# Altium PCB RemoteQuarium_pcb_design.PcbDoc
Units mm, origin at the board's own origin, x right, y up, seen from the top; angles counter-clockwise.
Board outline 63.5 x 89.41 mm, 2 copper layers (F.Cu, B.Cu); 22 components, 37 nets, 118 pads, 0 vias.
Unrouted connection lines stored in the file: 5.
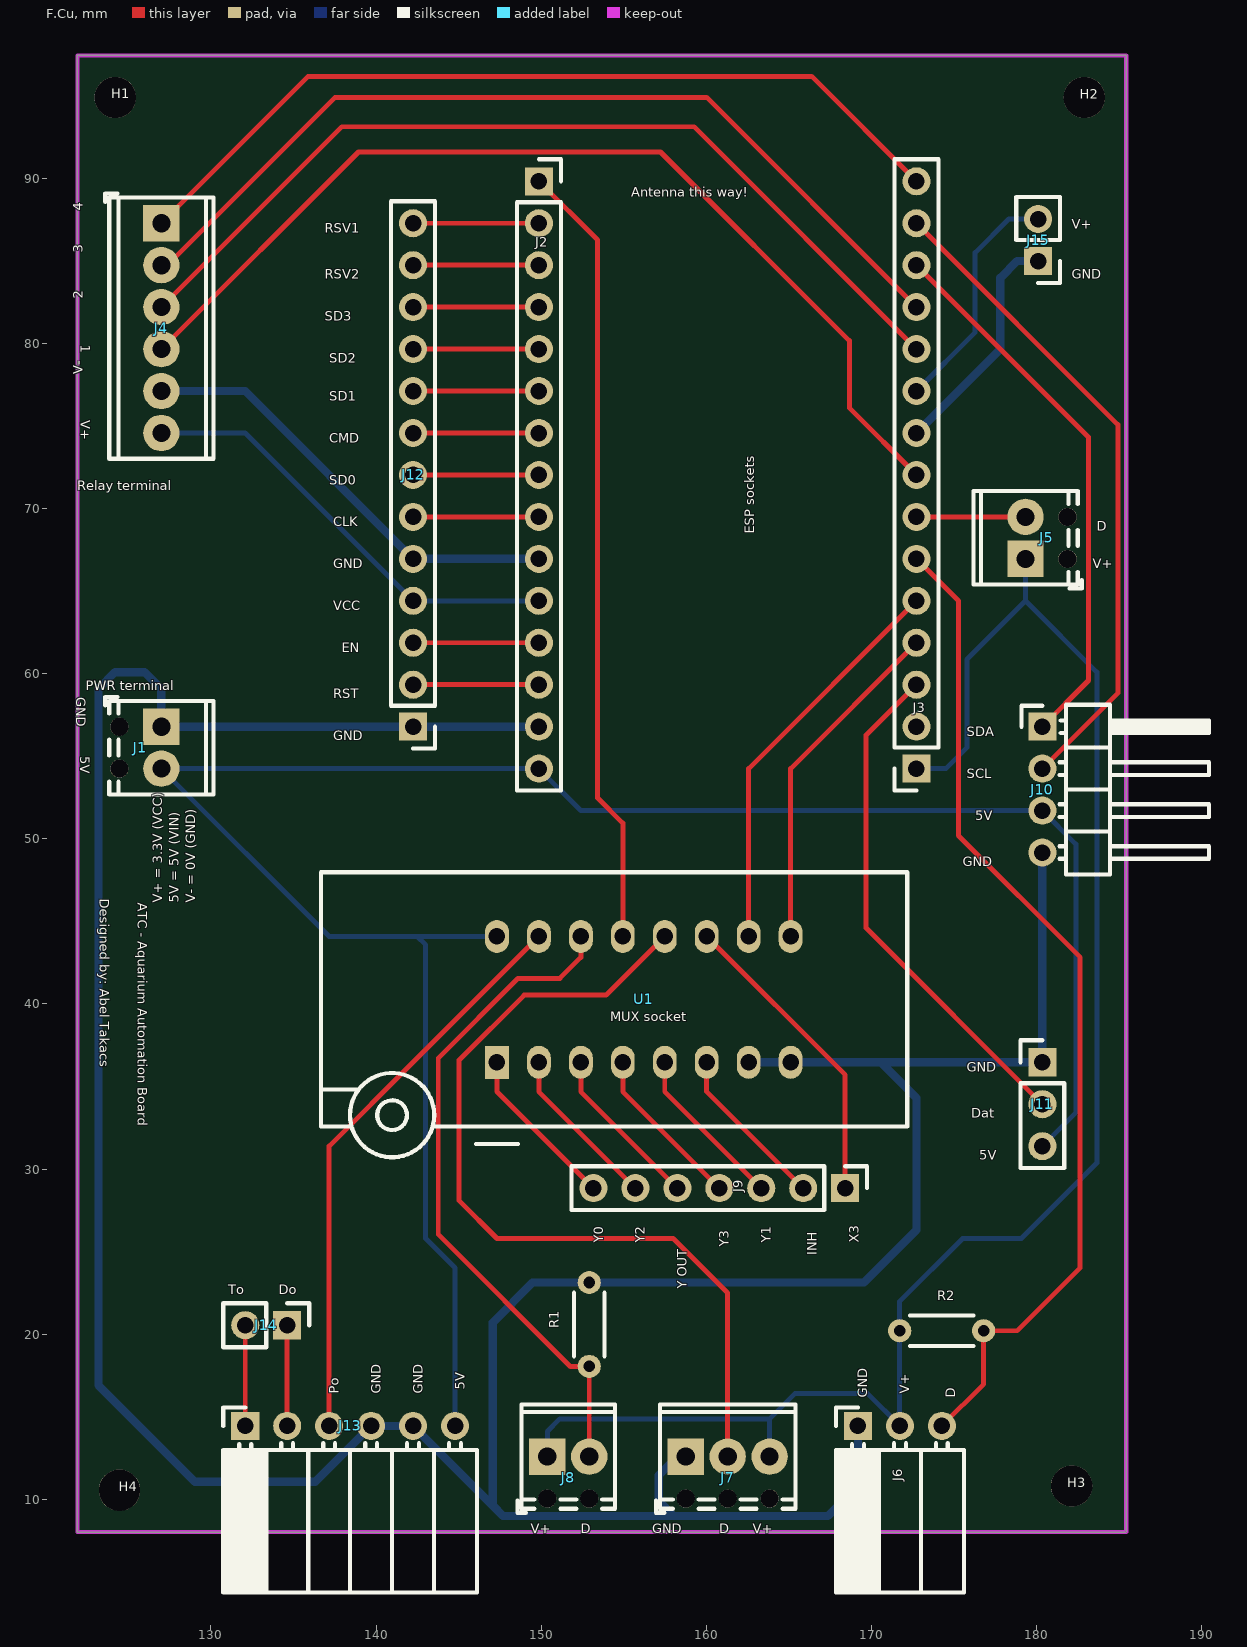
[diagram p0: F.Cu view]
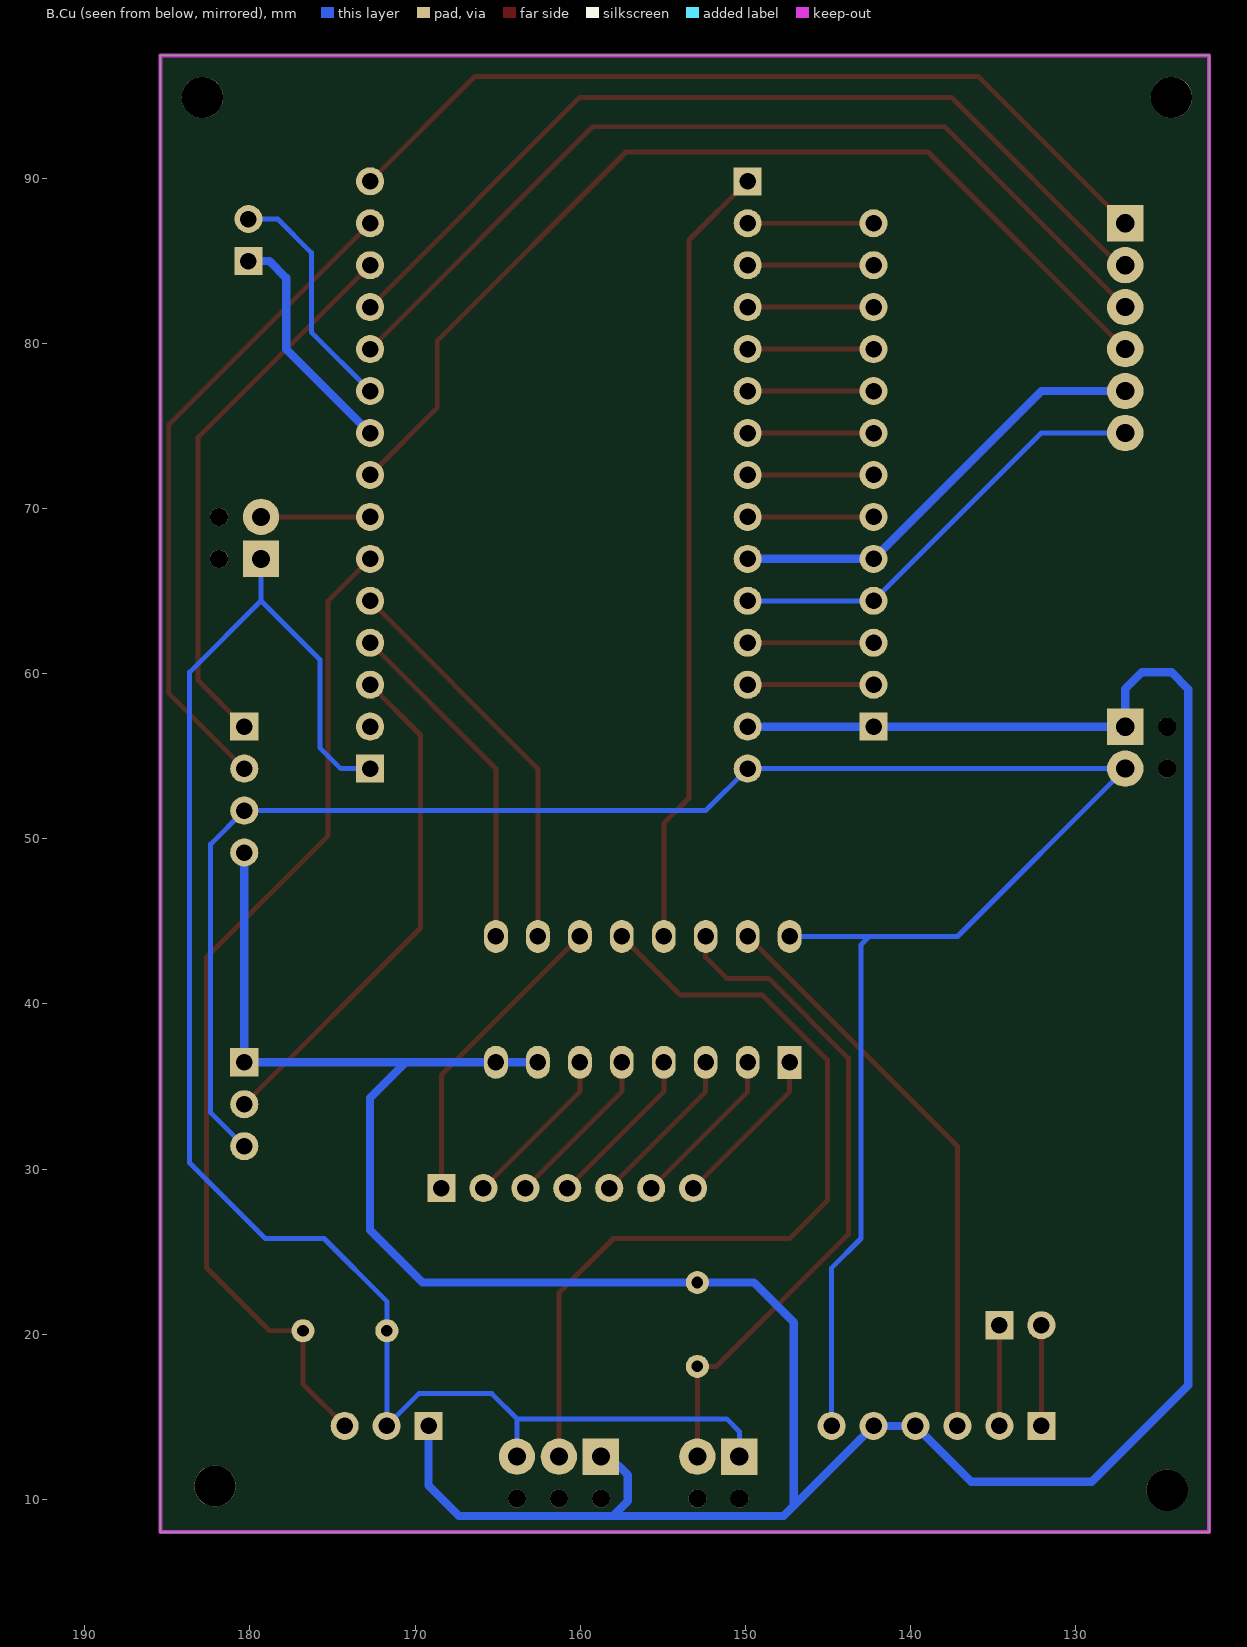
[diagram p1: B.Cu view, seen from below]

## Layer stack, top to bottom
F.Mask: solder mask 0.0102, Solder Resist, Dk 3.5
F.Cu: signal copper 0.0356
Dielectric 1: dielectric 0.32, FR-4, Dk 4.8
B.Cu: signal copper 0.0356
B.Mask: solder mask 0.0102, Solder Resist, Dk 3.5

## Board outline
185.42,8.018 185.42,97.426 121.92,97.426 121.92,8.018 185.42,8.018

## Design rules (kind name [scope] priority, off if disabled: settings)
Clearance [All] p1: gap=0.254 ignorepadtopadclearanceinfootprint=FALSE except(0: Arc-Hole Track-Hole SMDPad-Hole THPad-Hole Via-Hole Fill-Hole Poly-Hole Region-Hole Text-Hole)
MinimumSolderMaskSliver [All] p1: minsoldermaskwidth=0
PolygonConnect [All] p1: connectstyle=Direct reliefconductorwidth=0.254 reliefentries=4 polygonreliefangle="90 Angle" airgapwidth=0.254
RoutingVias [All] p1: holewidth=0.711 width=1.27 viastyle="Through Hole" minholewidth=0.711 minwidth=1.27 maxholewidth=0.711 maxwidth=1.27
SilkToSilkClearance [All] p1: silktosilkclearance=0
SilkToSolderMaskClearance [IsPad] p1: minsilkscreentomaskgap=0 clearancetoexposedcopper=TRUE
SolderMaskExpansion [All] p1: expansion=0.102 istentingtop=FALSE
Width [All] p1: maxlimit=10 minlimit=0.254 preferedwidth=0.254 minimp=50.000000 maximp=50.000000 favimp=50.000000
27 further rules are at their usual default settings.

## Components (designator, comment, footprint, x,y, rotation, side; value= is the part's Value field where it differs from the comment)
H1 "MountingHole" MountingHole_2.5mm 124.206,94.886 r0 top
H2 "MountingHole" MountingHole_2.5mm 182.88,94.886 r0 top
H3 "MountingHole" MountingHole_2.5mm 182.118,10.812 r0 top
H4 "MountingHole" MountingHole_2.5mm 124.46,10.558 r0 top
J1 "Power_terminal" TerminalBlock_Phoenix_MPT-0,5-2-2.54_1x02_P2.54mm_Horizontal 127,56.786 r270 top
J2 "ESP left side sockets" PinSocket_1x15_P2.54mm_Vertical 149.86,89.806 r0 top
J3 "ESP right side sockets" PinSocket_1x15_P2.54mm_Vertical 172.72,54.246 r180 top
J4 "Relay_terminal" TerminalBlock_Phoenix_MPT-0,5-6-2.54_1x06_P2.54mm_Horizontal 127,87.266 r270 top
J5 "Calibration_btn" TerminalBlock_Phoenix_MPT-0,5-2-2.54_1x02_P2.54mm_Horizontal 179.324,66.946 r90 top
J6 "Temp_sensor_socket" PinSocket_1x03_P2.54mm_Horizontal 169.179,14.45 r90 top
J7 "Water_sensor_terminal" TerminalBlock_Phoenix_MPT-0,5-3-2.54_1x03_P2.54mm_Horizontal 158.75,12.59 r0 top
J8 "Light_sensor_terminal" TerminalBlock_Phoenix_MPT-0,5-2-2.54_1x02_P2.54mm_Horizontal 150.368,12.59 r0 top
J9 "MUX_pins" PinHeader_1x07_P2.54mm_Vertical 168.402,28.846 r270 top
J10 "LCD_pins" PinHeader_1x04_P2.54mm_Horizontal 180.34,56.786 r0 top
J11 "Feeder_servo_pins" PinHeader_1x03_P2.54mm_Vertical 180.34,36.466 r0 top
J12 "ESP_pins" PinHeader_1x13_P2.54mm_Vertical 142.24,56.786 r180 top
J13 "PH_sensor_sockets" PinSocket_1x06_P2.54mm_Horizontal 132.08,14.45 r90 top
J14 "Ph_sesnor-pins" PinHeader_1x02_P2.54mm_Vertical 134.62,20.546 r270 top
J15 "Vcc-GND" PinHeader_1x02_P2.54mm_Vertical 180.086,84.98 r180 top
R1 "10000" R_Axial_DIN0204_L3.6mm_D1.6mm_P5.08mm_Horizontal 152.908,18.051 r90 top
R2 "4700R" R_Axial_DIN0204_L3.6mm_D1.6mm_P5.08mm_Horizontal 171.704,20.21 r0 top
U1 "CD4052BE" DIP_Socket-16_W4.3_W5.08_W7.62_W10.16_W10.9_3M_216-3340-00-0602J 147.32,36.466 r90 top

## Footprints (in the part's own frame and the unit in brackets; to place one, negate y for a bottom-side part, rotate by r counter-clockwise, add the part's x,y. Pads: shape width x height; smd on the part's side, far side on the other; paste and mask are expansions set on the pad)
DIP_Socket-16_W4.3_W5.08_W7.62_W10.16_W10.9_3M_216-3340-00-0602J [mm]
  rect 2x1.44 hole 1 paste-2 mask+0: 1(0,0)
  rrect100% 2x1.44 hole 1 paste-2 mask+0: 2(0,-2.54) 3(0,-5.08) 4(0,-7.62) 5(0,-10.16) 6(0,-12.7) 7(0,-15.24) 8(0,-17.78) 9(7.62,-17.78) 10(7.62,-15.24) 11(7.62,-12.7) 12(7.62,-10.16) 13(7.62,-7.62) 14(7.62,-5.08) 15(7.62,-2.54) 16(7.62,0)
  silkscreen extent -5.75,-24.84 11.51,10.66
MountingHole_2.5mm [mm]
  round 2.5 hole 2.5 paste-2.5 mask+0: Un1(0,0)
PinHeader_1x02_P2.54mm_Vertical [mm]
  rect 1.7x1.7 hole 1 paste-1.7 mask+0: 1(0,0)
  rrect100% 1.7x1.7 hole 1 paste-1.7 mask+0: 2(0,-2.54)
  silkscreen extent -1.33,-3.87 1.33,1.33
PinHeader_1x03_P2.54mm_Vertical [mm]
  rect 1.7x1.7 hole 1 paste-1.7 mask+0: 1(0,0)
  rrect100% 1.7x1.7 hole 1 paste-1.7 mask+0: 2(0,-2.54) 3(0,-5.08)
  silkscreen extent -1.33,-6.41 1.33,1.33
PinHeader_1x04_P2.54mm_Horizontal [mm]
  rect 1.7x1.7 hole 1 paste-1.7 mask+0: 1(0,0)
  rrect100% 1.7x1.7 hole 1 paste-1.7 mask+0: 2(0,-2.54) 3(0,-5.08) 4(0,-7.62)
  silkscreen extent -1.27,-8.95 10.1,1.33
PinHeader_1x07_P2.54mm_Vertical [mm]
  rect 1.7x1.7 hole 1 paste-1.7 mask+0: 1(0,0)
  rrect100% 1.7x1.7 hole 1 paste-1.7 mask+0: 2(0,-2.54) 3(0,-5.08) 4(0,-7.62) 5(0,-10.16) 6(0,-12.7) 7(0,-15.24)
  silkscreen extent -1.33,-16.57 1.33,1.33
PinHeader_1x13_P2.54mm_Vertical [mm]
  rect 1.7x1.7 hole 1 paste-1.7 mask+0: 1(0,0)
  rrect100% 1.7x1.7 hole 1 paste-1.7 mask+0: 2(0,-2.54) 3(0,-5.08) 4(0,-7.62) 5(0,-10.16) 6(0,-12.7) 7(0,-15.24) 8(0,-17.78) 9(0,-20.32) 10(0,-22.86) 11(0,-25.4) 12(0,-27.94) 13(0,-30.48)
  silkscreen extent -1.33,-31.81 1.33,1.33
PinSocket_1x03_P2.54mm_Horizontal [mm]
  rect 1.7x1.7 hole 1 paste-1.7 mask+0: 1(0,0)
  rrect100% 1.7x1.7 hole 1 paste-1.7 mask+0: 2(0,-2.54) 3(0,-5.08)
  silkscreen extent -10.09,-6.41 1.11,1.33
PinSocket_1x06_P2.54mm_Horizontal [mm]
  rect 1.7x1.7 hole 1 paste-1.7 mask+0: 1(0,0)
  rrect100% 1.7x1.7 hole 1 paste-1.7 mask+0: 2(0,-2.54) 3(0,-5.08) 4(0,-7.62) 5(0,-10.16) 6(0,-12.7)
  silkscreen extent -10.09,-14.03 1.11,1.33
PinSocket_1x15_P2.54mm_Vertical [mm]
  rect 1.7x1.7 hole 1 paste-1.7 mask+0: 1(0,0)
  rrect100% 1.7x1.7 hole 1 paste-1.7 mask+0: 2(0,-2.54) 3(0,-5.08) 4(0,-7.62) 5(0,-10.16) 6(0,-12.7) 7(0,-15.24) 8(0,-17.78) 9(0,-20.32) 10(0,-22.86) 11(0,-25.4) 12(0,-27.94) 13(0,-30.48) 14(0,-33.02) 15(0,-35.56)
  silkscreen extent -1.33,-36.89 1.33,1.33
R_Axial_DIN0204_L3.6mm_D1.6mm_P5.08mm_Horizontal [mm]
  round 1.4 hole 0.7 paste-1.4 mask+0: 1(0,0)
  rrect100% 1.4x1.4 hole 0.7 paste-1.4 mask+0: 2(5.08,0)
  silkscreen extent 0.62,-0.92 4.46,0.92
TerminalBlock_Phoenix_MPT-0,5-2-2.54_1x02_P2.54mm_Horizontal [mm]
  rect 2.2x2.2 hole 1.1 paste-2.2 mask+0: 1(0,0)
  round 2.2 hole 1.1 paste-2.2 mask+0: 2(2.54,0)
  round 1.1 hole 1.1 paste-1.1 mask+0: Un1(0,-2.54) Un2(2.54,-2.54)
  silkscreen extent -1.8,-3.4 4.1,3.16
TerminalBlock_Phoenix_MPT-0,5-3-2.54_1x03_P2.54mm_Horizontal [mm]
  rect 2.2x2.2 hole 1.1 paste-2.2 mask+0: 1(0,0)
  round 2.2 hole 1.1 paste-2.2 mask+0: 2(2.54,0) 3(5.08,0)
  round 1.1 hole 1.1 paste-1.1 mask+0: Un1(0,-2.54) Un2(2.54,-2.54) Un3(5.08,-2.54)
  silkscreen extent -1.8,-3.4 6.64,3.16
TerminalBlock_Phoenix_MPT-0,5-6-2.54_1x06_P2.54mm_Horizontal [mm]
  rect 2.2x2.2 hole 1.1 paste-2.2 mask+0: 1(0,0)
  round 2.2 hole 1.1 paste-2.2 mask+0: 2(2.54,0) 3(5.08,0) 4(7.62,0) 5(10.16,0) 6(12.7,0)
  silkscreen extent -1.8,-3.4 14.26,3.16

## Part data
H1 H2 H3 H4: library part MountingHole_2.5mm, "Mounting Hole 2.5mm, no annular", Sheetfile=RemoteQuarium_pcb_design.kicad_sch, ki_description="Mounting Hole without connection", ki_keywords="mounting hole"
J1 J5 J8: library part TerminalBlock_Phoenix_MPT-0,5-2-2.54_1x02_P2.54mm_Horizontal, "Terminal Block Phoenix MPT-0,5-2-2.54, 2 pins, pitch 2.54mm, size 5.54x6.2mm^2, drill diamater 1.1mm, pad diameter 2.2mm, see http://www.mouser.com/ds/2/324/ItemDetail_1725656-920552.pdf, script-generated using https://github.com/pointhi/kicad-footprint-generator/scripts/TerminalBlock_Phoenix", Sheetfile=RemoteQuarium_pcb_design.kicad_sch, ki_description="Generic screw terminal, single row, 01x02, script generated (kicad-library-utils/schlib/autogen/connector/)", ki_keywords="screw terminal"
J2 J3: library part PinSocket_1x15_P2.54mm_Vertical, "Through hole straight socket strip, 1x15, 2.54mm pitch, single row (from Kicad 4.0.7), script generated", Sheetfile=RemoteQuarium_pcb_design.kicad_sch, ki_description="Generic connector, single row, 01x15, script generated", ki_keywords=connector
J4: library part TerminalBlock_Phoenix_MPT-0,5-6-2.54_1x06_P2.54mm_Horizontal, "Terminal Block Phoenix MPT-0,5-6-2.54, 6 pins, pitch 2.54mm, size 15.7x6.2mm^2, drill diamater 1.1mm, pad diameter 2.2mm, see http://www.mouser.com/ds/2/324/ItemDetail_1725672-916605.pdf, script-generated using https://github.com/pointhi/kicad-footprint-generator/scripts/TerminalBlock_Phoenix", Sheetfile=RemoteQuarium_pcb_design.kicad_sch, ki_description="Generic screw terminal, single row, 01x06, script generated (kicad-library-utils/schlib/autogen/connector/)", ki_keywords="screw terminal"
J6: library part PinSocket_1x03_P2.54mm_Horizontal, "Through hole angled socket strip, 1x03, 2.54mm pitch, 8.51mm socket length, single row (from Kicad 4.0.7), script generated", Sheetfile=RemoteQuarium_pcb_design.kicad_sch, ki_description="Generic connector, single row, 01x03, script generated", ki_keywords=connector
J7: library part TerminalBlock_Phoenix_MPT-0,5-3-2.54_1x03_P2.54mm_Horizontal, "Terminal Block Phoenix MPT-0,5-3-2.54, 3 pins, pitch 2.54mm, size 8.08x6.2mm^2, drill diamater 1.1mm, pad diameter 2.2mm, see http://www.mouser.com/ds/2/324/ItemDetail_1725656-920552.pdf, script-generated using https://github.com/pointhi/kicad-footprint-generator/scripts/TerminalBlock_Phoenix", Sheetfile=RemoteQuarium_pcb_design.kicad_sch, ki_description="Generic screw terminal, single row, 01x03, script generated (kicad-library-utils/schlib/autogen/connector/)", ki_keywords="screw terminal"
J9: library part PinHeader_1x07_P2.54mm_Vertical, "Through hole straight pin header, 1x07, 2.54mm pitch, single row", Sheetfile=RemoteQuarium_pcb_design.kicad_sch, ki_description="Generic connector, single row, 01x07, script generated (kicad-library-utils/schlib/autogen/connector/)", ki_keywords=connector
J10: library part PinHeader_1x04_P2.54mm_Horizontal, "Through hole angled pin header, 1x04, 2.54mm pitch, 6mm pin length, single row", Sheetfile=RemoteQuarium_pcb_design.kicad_sch, ki_description="Generic connector, single row, 01x04, script generated (kicad-library-utils/schlib/autogen/connector/)", ki_keywords=connector
J11: library part PinHeader_1x03_P2.54mm_Vertical, "Through hole straight pin header, 1x03, 2.54mm pitch, single row", Sheetfile=RemoteQuarium_pcb_design.kicad_sch, ki_description="Generic connector, single row, 01x03, script generated (kicad-library-utils/schlib/autogen/connector/)", ki_keywords=connector
J12: library part PinHeader_1x13_P2.54mm_Vertical, "Through hole straight pin header, 1x13, 2.54mm pitch, single row", Sheetfile=RemoteQuarium_pcb_design.kicad_sch, ki_description="Generic connector, single row, 01x13, script generated (kicad-library-utils/schlib/autogen/connector/)", ki_keywords=connector
J13: library part PinSocket_1x06_P2.54mm_Horizontal, "Through hole angled socket strip, 1x06, 2.54mm pitch, 8.51mm socket length, single row (from Kicad 4.0.7), script generated", Sheetfile=RemoteQuarium_pcb_design.kicad_sch, ki_description="Generic connector, single row, 01x06, script generated", ki_keywords=connector
J14 J15: library part PinHeader_1x02_P2.54mm_Vertical, "Through hole straight pin header, 1x02, 2.54mm pitch, single row", Sheetfile=RemoteQuarium_pcb_design.kicad_sch, ki_description="Generic connector, single row, 01x02, script generated (kicad-library-utils/schlib/autogen/connector/)", ki_keywords=connector
R1 R2: library part R_Axial_DIN0204_L3.6mm_D1.6mm_P5.08mm_Horizontal, "Resistor, Axial_DIN0204 series, Axial, Horizontal, pin pitch=5.08mm, 0.167W, length*diameter=3.6*1.6mm^2, http://cdn-reichelt.de/documents/datenblatt/B400/1_4W%23YAG.pdf", Sheetfile=RemoteQuarium_pcb_design.kicad_sch, ki_description=Resistor, ki_keywords="R res resistor"
U1: library part DIP_Socket-16_W4.3_W5.08_W7.62_W10.16_W10.9_3M_216-3340-00-0602J, "3M 16-pin zero insertion force socket, through-hole, row spacing 7.62 mm (300 mils), http://multimedia.3m.com/mws/media/494546O/3mtm-dip-sockets-100-2-54-mm-ts0365.pdf", Package="PDIP-16 Texas Instruments", Availability="In Stock", Check_prices=https://www.snapeda.com/parts/CD4052BE/Texas+Instruments/view-part/?ref=eda, Description="\n20-V, 4:1, 2-channel general-purpose multiplexer\n", MF="Texas Instruments", MP=CD4052BE, Price=None, Purchase-URL="https://www.snapeda.com/api/url_track_click_mouser/?unipart_id=229377&manufacturer=Texas Instruments&part_name=CD4052BE&search_term=None", Sheetfile=RemoteQuarium_pcb_design.kicad_sch, SnapEDA_Link=https://www.snapeda.com/parts/CD4052BE/Texas+Instruments/view-part/?ref=snap

## Nets (pads, with @x,y where several pads share a name; then routed paths per layer and width w, separated by ;. In a path a pad name is that pad's centre, name@x,y a point inside that pad or via, vN(x,y) a via of type N, cw(c..) or ccw(c..) an arc to the next point about the centre after c; other vN are vias at no path point)
A0: J2.1 U1.13 | length 47.8
  F.Cu w0.3: J2.1 153.416,86.25 153.416,52.468 154.94,50.944 154.94,48.912 U1.13
CLK: J2.9 J12.6 | length 7.6
  F.Cu w0.3: J12.6 J2.9
CMD: J2.7 J12.8 | length 7.6
  F.Cu w0.3: J12.8 J2.7
D0: J3.15 J4.1 | length 52
  F.Cu w0.3: J4.1 135.89,96.156 166.37,96.156 J3.15
D3: J3.12 J4.2 | length 55.2
  F.Cu w0.3: J4.2 127.36,84.726 137.52,94.886 160.02,94.886 J3.12
D4: J3.11 J4.3 | length 55.8
  F.Cu w0.3: J4.3 137.922,93.108 159.258,93.108 J3.11
D5: J3.8 J4.4 | length 61.1
  F.Cu w0.3: J4.4 138.938,91.584 157.226,91.584 168.656,80.154 168.656,76.09 J3.8
D6: J3.7 J5.2 | length 6.6
  F.Cu w0.3: J3.7 J5.2
D7: J3.6 J6.3 R2.2 | length 61.3
  F.Cu w0.3: J3.6 175.26,64.406 175.26,50.182 182.626,42.816 182.626,24.02 178.816,20.21 R2.2 176.784,16.975 J6.3
D8: J3.5 U1.10 | length 24.5
  F.Cu w0.3: U1.10 162.56,49.166 162.56,54.246 J3.5
Do: J13.2 J14.1 | length 6.1
  F.Cu w0.3: J13.2 J14.1
EN: J2.12 J12.3 | length 7.6
  F.Cu w0.3: J12.3 J2.12
GND: J1.1 J2.10 J2.14 J3.2 J3.9 J4.5 J6.1 J7.1 J10.4 J11.1 J12.1 J12.5 J13.4 J13.5 J15.1 R1.2 U1.7 U1.8 | length 256.1
  B.Cu w0.5: J4.5 132.08,77.106 J12.5 J2.10 ; J2.14 J12.1 J1.1 127,59.072 125.984,60.088 124.206,60.088 123.19,59.072 123.19,16.908 129.032,11.066 136.316,11.066 J13.4 J13.5 147.69,9 ; J7.1 158.242,12.59 157.119,11.467 157.119,9.903 158.022,9 ; U1.7 U1.8 170.561,36.466 170.624,36.403 ; J6.1 169.179,10.827 167.352,9 158.022,9 ; J3.9 177.8,79.646 177.8,83.964 178.816,84.98 J15.1 ; J10.4 J11.1 170.688,36.466 170.624,36.403 ; 147.69,9 158.022,9 ; 147.69,9 147.066,9.624 147.066,20.718 149.479,23.131 R1.2 169.545,23.131 172.72,26.306 172.72,34.307 170.624,36.403
INH: J9.2 U1.6 | length 10
  F.Cu w0.3: U1.6 160.02,34.688 J9.2
LIGHT_DAT: J8.2 R1.1 U1.14 | length 40.9
  F.Cu w0.3: U1.14 152.4,42.816 151.13,41.546 148.59,41.546 143.764,36.72 143.764,26.052 151.765,18.051 R1.1 J8.2@152.908,12.717
P0: J13.3 U1.15 | length 34.9
  F.Cu w0.3: J13.3 137.16,31.386 142.24,36.466 U1.15
RST: J2.13 J12.2 | length 7.6
  F.Cu w0.3: J12.2 J2.13
RSV1: J2.2 J12.13 | length 7.6
  F.Cu w0.3: J12.13 J2.2
RSV2: J2.3 J12.12 | length 7.6
  F.Cu w0.3: J12.12 J2.3
RX: J3.4 U1.9 | length 20.9
  F.Cu w0.3: U1.9 165.1,49.166 165.1,54.246 J3.4
SCL: J3.14 J10.2 | length 40
  F.Cu w0.3: J3.14 184.912,75.074 184.912,58.818 J10.2
SD0: J2.8 J12.7 | length 7.6
  F.Cu w0.3: J12.7 J2.8
SD1: J2.6 J12.9 | length 7.6
  F.Cu w0.3: J12.9 J2.6
SD2: J2.5 J12.10 | length 7.6
  F.Cu w0.3: J12.10 J2.5
SD3: J2.4 J12.11 | length 7.6
  F.Cu w0.3: J12.11 J2.4
SDA: J3.13 J10.1 | length 33.4
  F.Cu w0.3: J3.13 183.134,74.312 183.134,59.58 J10.1
T0: J13.1 J14.2 | length 6.1
  F.Cu w0.3: J13.1 J14.2
TX: J3.3 J11.2 | length 31.1
  F.Cu w0.3: J3.3 169.672,56.278 169.672,44.594 J11.2
VCC: J2.11 J3.1 J3.10 J4.6 J5.1 J6.2 J7.3 J8.1 J12.4 J15.2 R2.1 | length 144.3
  F.Cu w0.3: R2.1 R2.1@171.719,20.195
  B.Cu w0.3: J4.6 132.08,74.566 J12.4 J2.11 ; J8.1 150.368,14.114 151.13,14.876 163.83,14.876 ; J7.3 163.83,14.876 ; J6.2@171.719,13.875 J6.2 ; J3.1 174.498,54.246 175.768,55.516 175.768,60.85 179.324,64.406 ; J3.10 176.276,80.662 176.276,85.488 178.308,87.52 J15.2 ; J5.1 179.324,64.406 ; 163.83,14.876 165.354,16.4 169.769,16.4 J6.2 ; J6.2 171.704,14.465 R2.1 171.704,21.988 175.514,25.798 179.07,25.798 183.642,30.37 183.642,60.088 179.324,64.406
VIN: J1.2 J2.15 J10.3 J11.3 J13.6 U1.16 | length 132
  B.Cu w0.3: J13.6 144.78,24.02 143.002,25.798 143.002,43.578 142.494,44.086 142.24,44.086 ; U1.16 142.24,44.086 ; 160.02,51.706 160.274,51.706 ; J11.3 182.372,33.418 182.372,49.674 J10.3 160.274,51.706 ; 142.24,44.086 137.16,44.086 J1.2 J2.15 152.4,51.706 160.274,51.706
WATER_DAT: J7.2 U1.12 | length 52.5
  F.Cu w0.3: U1.12 153.924,40.53 148.964,40.53 145.034,36.6 145.034,28.084 147.32,25.798 157.988,25.798 161.29,22.496 J7.2
X3: J9.1 U1.11 | length 18.7
  F.Cu w0.3: U1.11 168.402,35.704 J9.1
Y: J9.5 U1.3 | length 10
  F.Cu w0.3: U1.3 152.4,34.688 J9.5
Y0: J9.7 U1.1 | length 10
  F.Cu w0.3: U1.1 147.32,34.688 J9.7
Y1: J9.3 U1.5 | length 10
  F.Cu w0.3: U1.5 157.48,34.688 J9.3
Y2: J9.6 U1.2 | length 10.3
  F.Cu w0.3: U1.2 149.86,34.688 J9.6 J9.6@155.956,28.846
Y3: J9.4 U1.4 | length 10
  F.Cu w0.3: U1.4 154.94,34.688 J9.4
pads on no net: H1.Un1 H2.Un1 H3.Un1 H4.Un1 J1.Un1 J1.Un2 J5.Un1 J5.Un2 J7.Un1 J7.Un2 J7.Un3 J8.Un1 J8.Un2

## Keep-outs
Edge.Cuts:
  lines w0: 121.92,8.018 185.42,8.018 185.42,97.426 121.92,97.426 121.92,8.018
  lines w0.254: 121.92,8.018 185.42,8.018 185.42,97.426 121.92,97.426 121.92,8.018

## Silkscreen, mask and mechanical layers (free items; w line width, h text height)
F.SilkS:
  text "Antenna this way!" at 155.448,88.662 h1
  text "4" at 122.454,88.028 h1 r90
  text "V+" at 182.118,86.731 h1
  text "RSV1" at 136.906,86.474 h1
  text "3" at 122.459,85.488 h1 r90
  text "RSV2" at 136.906,83.68 h1
  text "GND" at 182.118,83.68 h1
  text "2" at 122.454,82.694 h1 r90
  text "SD3" at 136.906,81.138 h1
  text "1" at 121.897,79.9 h1 r270
  text "SD2" at 137.16,78.6 h1
  text "V-" at 122.455,78.122 h1 r90
  text "SD1" at 137.16,76.314 h1
  text "V+" at 121.893,75.328 h1 r270
  text "CMD" at 137.16,73.774 h1
  text "SD0" at 137.16,71.232 h1
  text "Relay terminal" at 121.92,70.882 h1
  text "CLK" at 137.414,68.694 h1
  text "ESP sockets" at 163.1,68.47 h1 r90
  text "D" at 183.642,68.447 h1
  text "V+" at 183.388,66.157 h1
  text "GND" at 137.414,66.154 h1
  text "VCC" at 137.414,63.614 h1
  text "EN" at 137.922,61.081 h1
  text "PWR terminal" at 122.428,58.786 h1
  text "GND" at 121.636,58.564 h1 r270
  text "RST" at 137.414,58.28 h1
  text "SDA" at 175.768,55.994 h1
  text "GND" at 137.414,55.74 h1
  text "5V" at 121.892,55.008 h1 r270
  text "SCL" at 175.768,53.454 h1
  text "5V" at 176.276,50.916 h1
  text "GND" at 175.514,48.12 h1
  text "Designed by: Abel Takacs" at 123.062,46.372 h1 r270
  text "ATC - Aquarium Automation Board" at 125.35,46.118 h1 r270
  text "V+ = 3.3V (VCC) / 5V = 5V (VIN) / V- = 0V (GND)" at 129.272,46.118 h1 r90
  text "MUX socket" at 154.178,38.724 h1
  text "GND" at 175.768,35.674 h1
  text "Dat" at 176.022,32.882 h1
  text "5V" at 176.53,30.342 h1
  text "Y0" at 153.955,25.544 h1 r90
  text "Y2" at 156.49,25.544 h1 r90
  text "Y1" at 164.107,25.544 h1 r90
  text "X3" at 169.449,25.544 h1 r90
  text "Y3" at 161.575,25.29 h1 r90
  text "INH" at 166.901,24.782 h1 r90
  text "Y OUT" at 159.034,22.75 h1 r90
  text "To" at 131.064,22.214 h1
  text "Do" at 134.112,22.214 h1
  text "5V" at 145.57,16.654 h1 r90
  text "Po" at 137.95,16.4 h1 r90
  text "GND" at 140.492,16.4 h1 r90
  text "GND" at 143.032,16.4 h1 r90
  text "V+" at 172.493,16.4 h1 r90
  text "GND" at 169.956,16.146 h1 r90
  text "D" at 175.283,16.146 h1 r90
  text "V+" at 149.352,7.737 h1
  text "D" at 152.4,7.741 h1
  text "D" at 160.782,7.741 h1
  text "V+" at 162.814,7.737 h1
  text "GND" at 156.718,7.734 h1